# Altium PCB pwir21-NUCLEO-adapter.PcbDoc
Units mm, origin at the board's own origin, x right, y up, seen from the top; angles counter-clockwise.
Board outline 36 x 50 mm, 4 copper layers (Top Layer, L2, L3, Bottom Layer), stack 1.588 mm thick; 25 components, 30 nets, 123 pads, 174 vias.
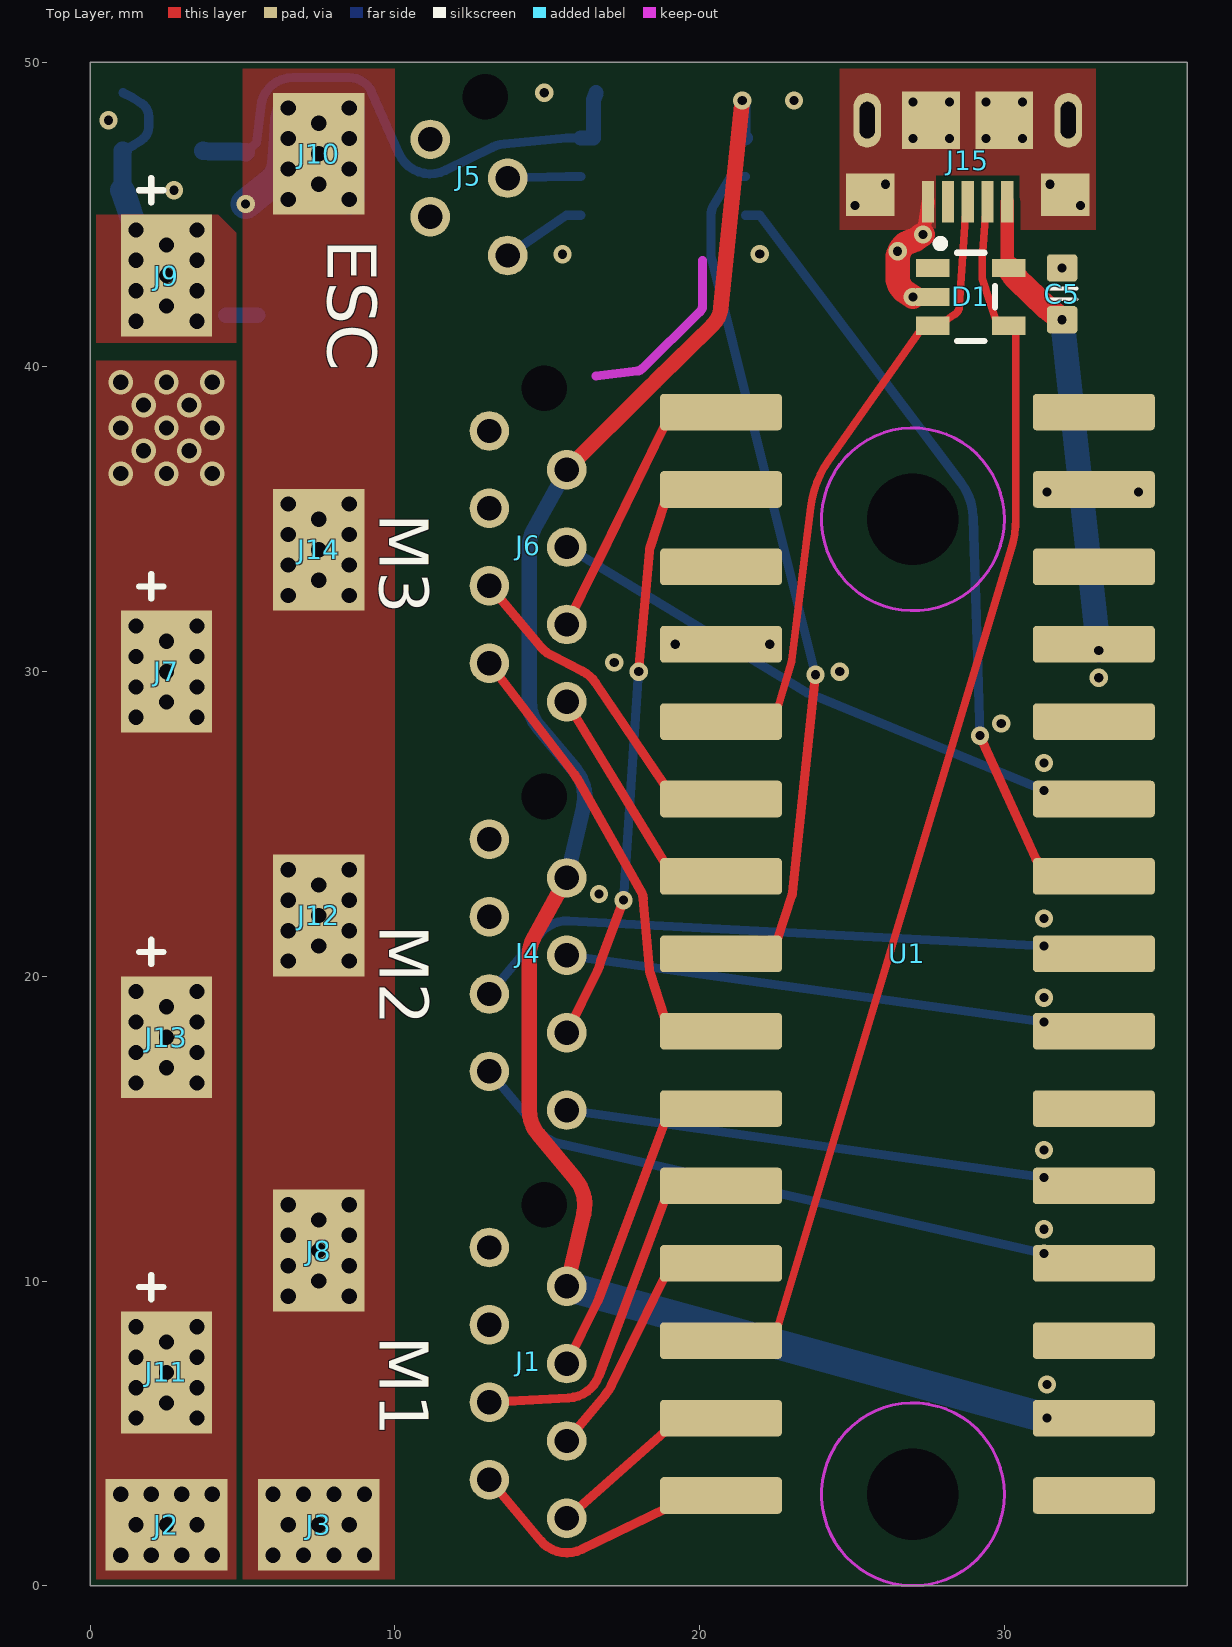
[diagram p0: Top Layer view]
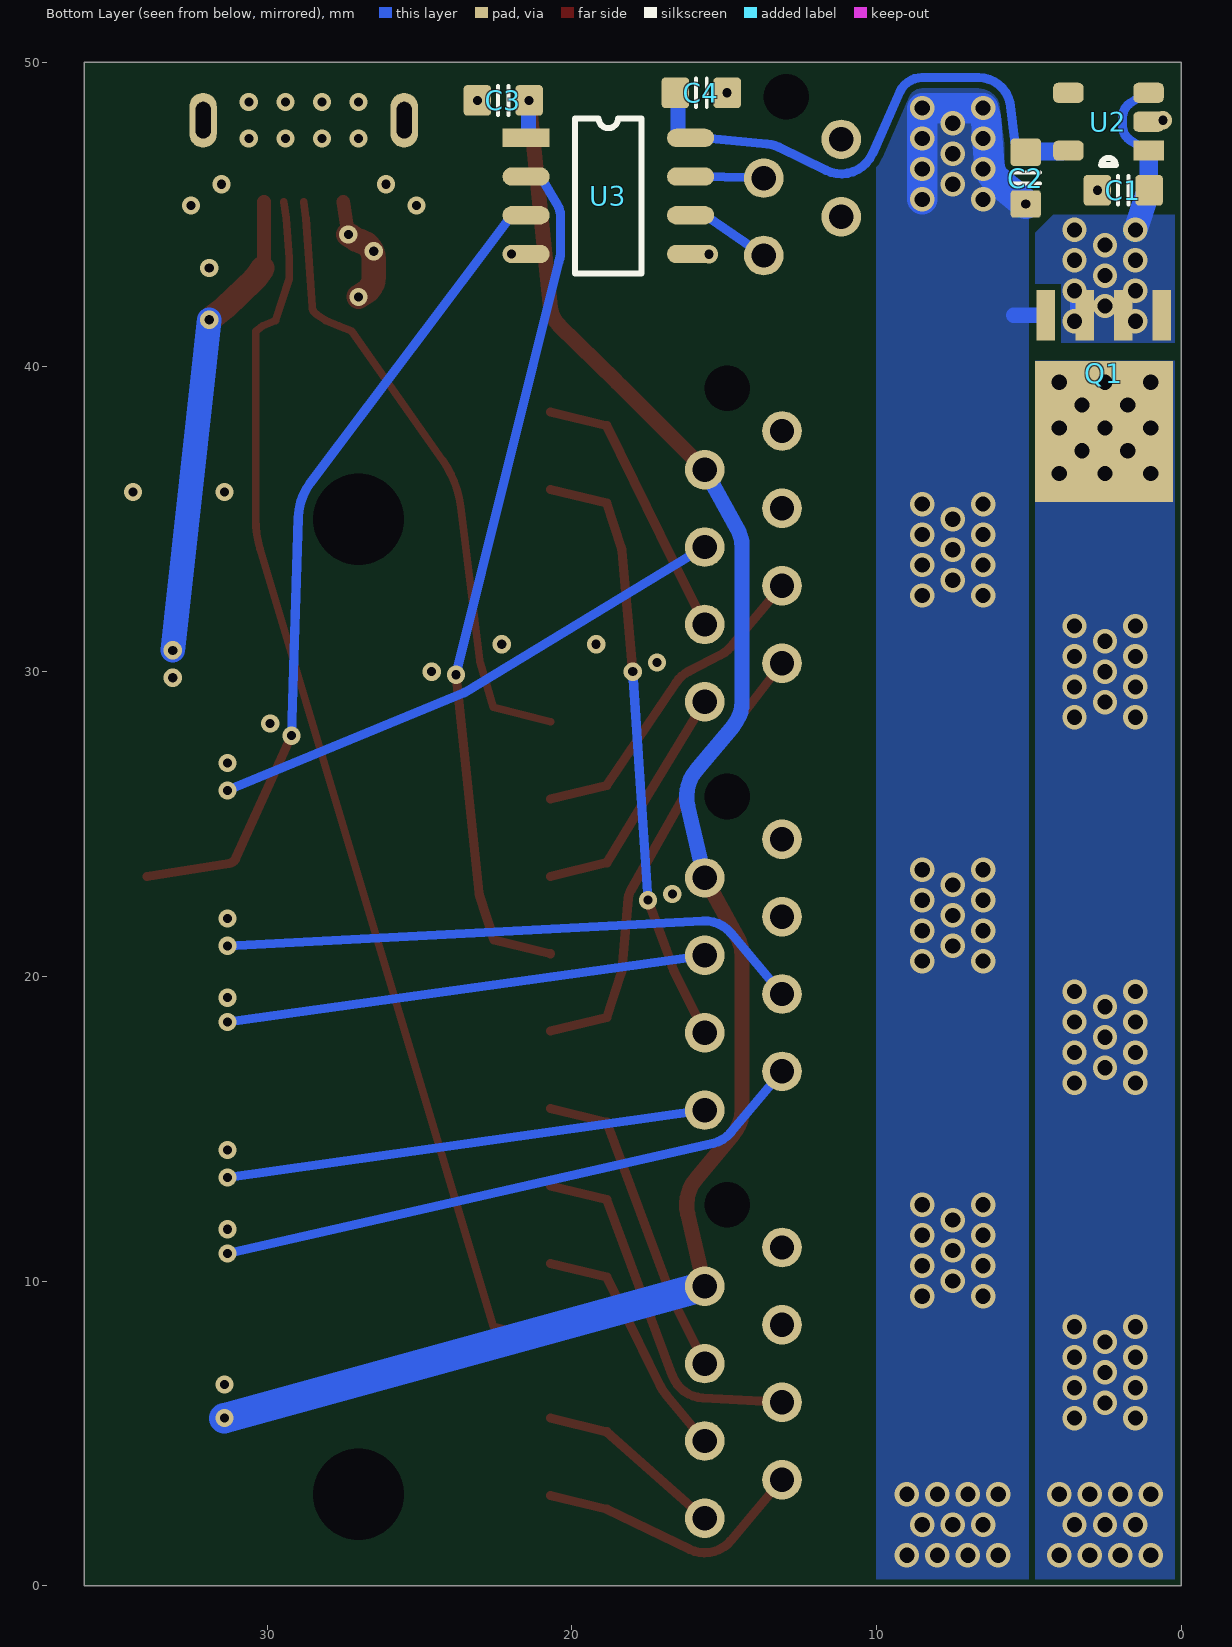
[diagram p1: Bottom Layer view, seen from below]
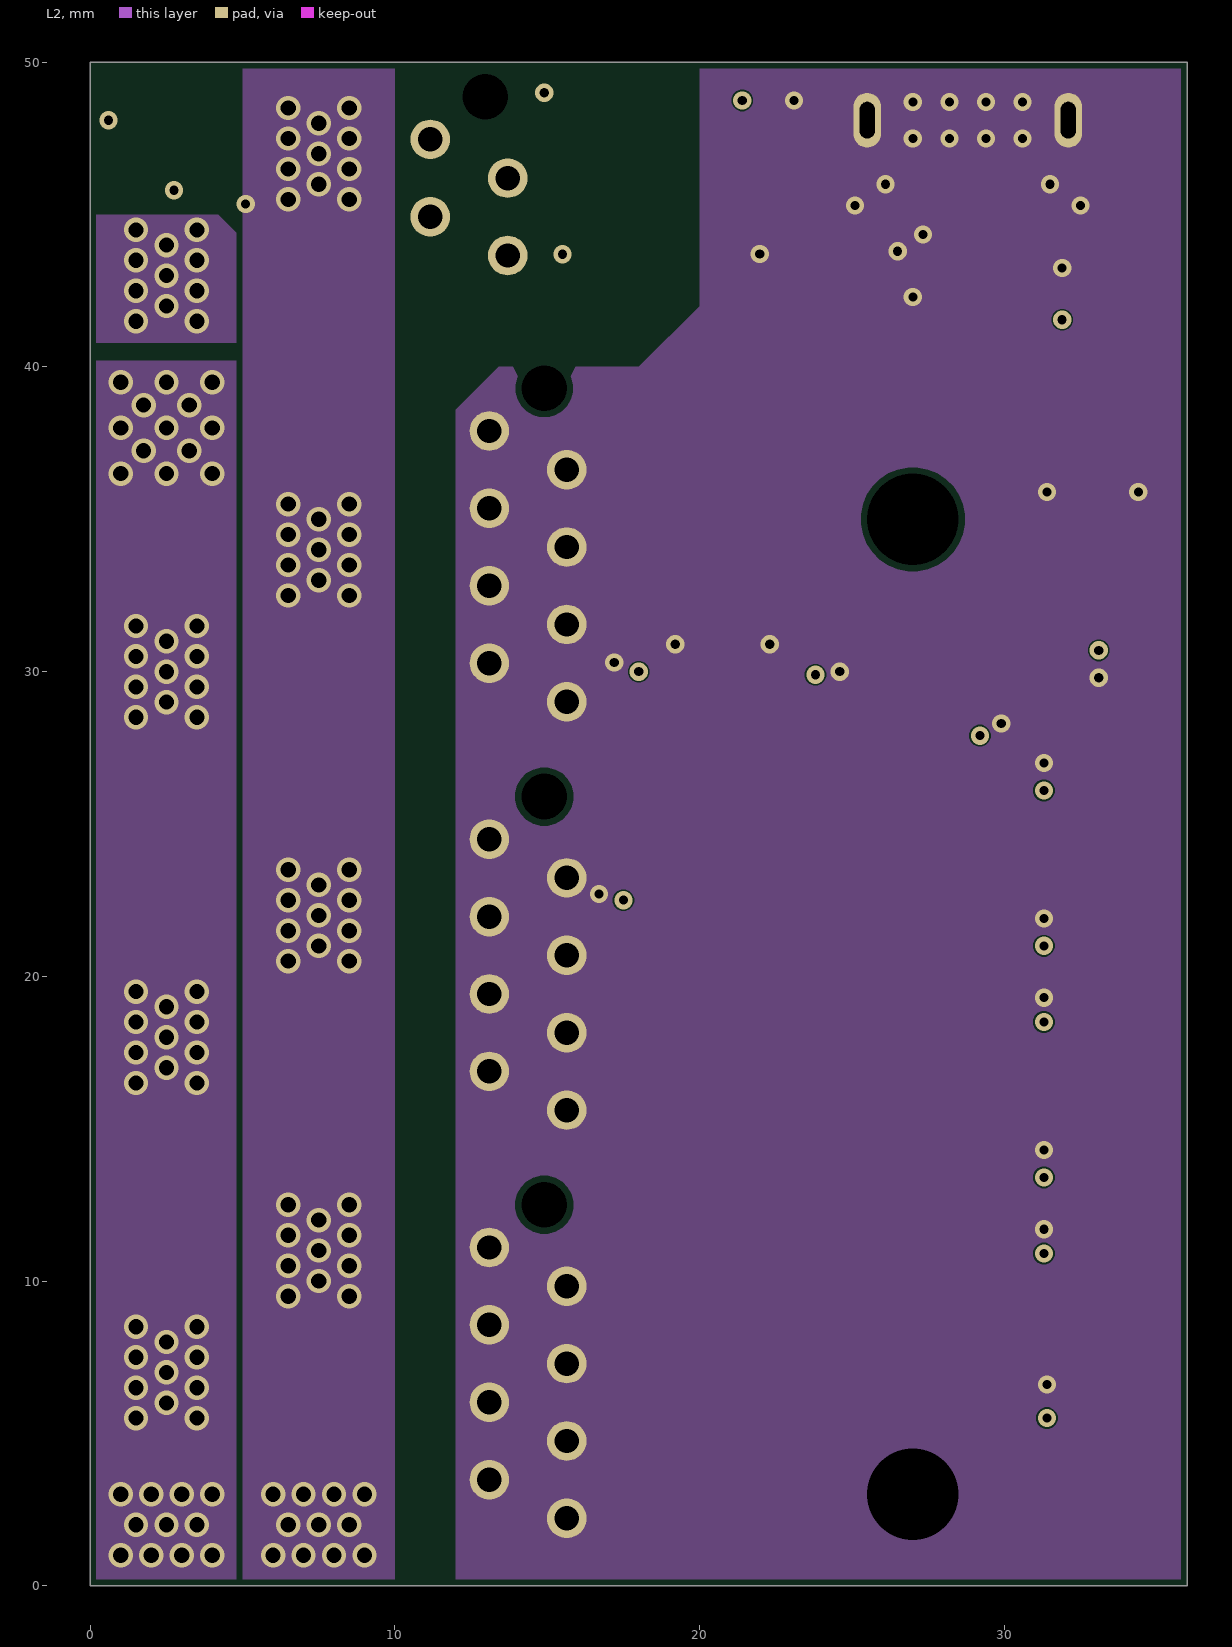
[diagram p2: L2]
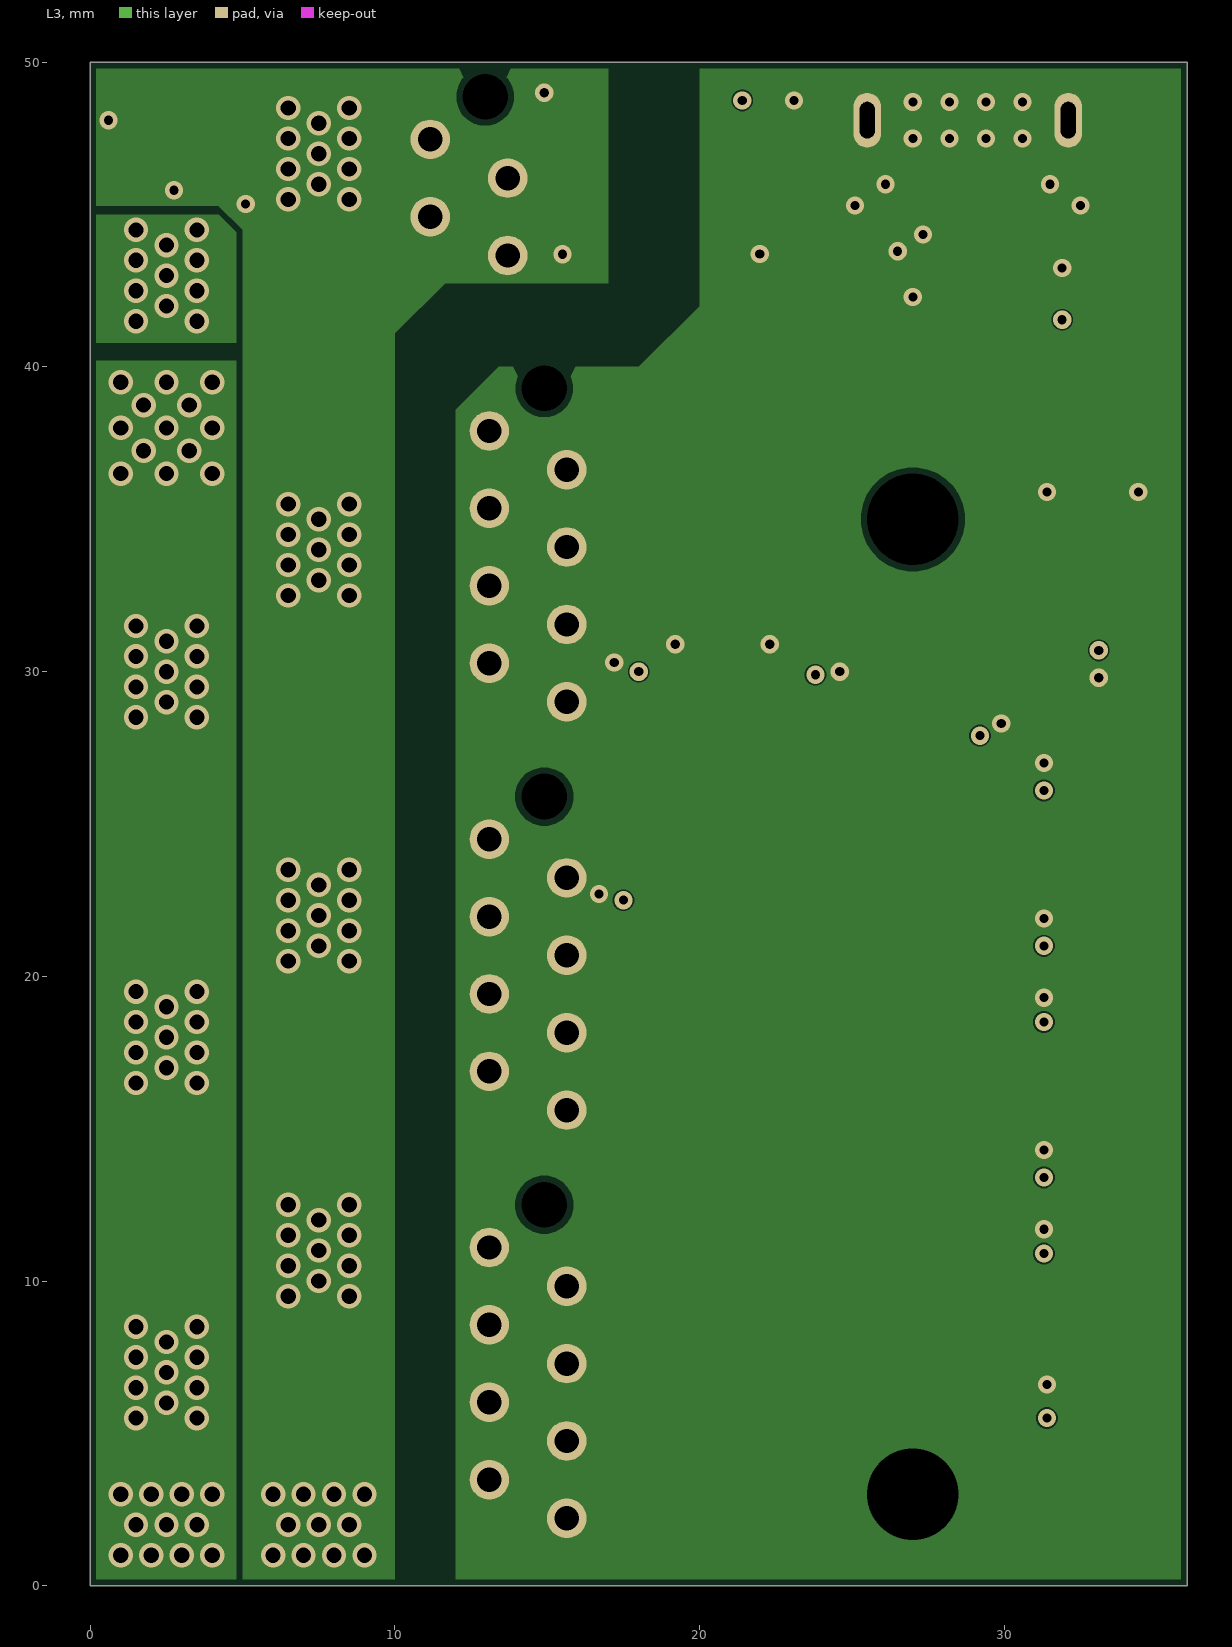
[diagram p3: L3]
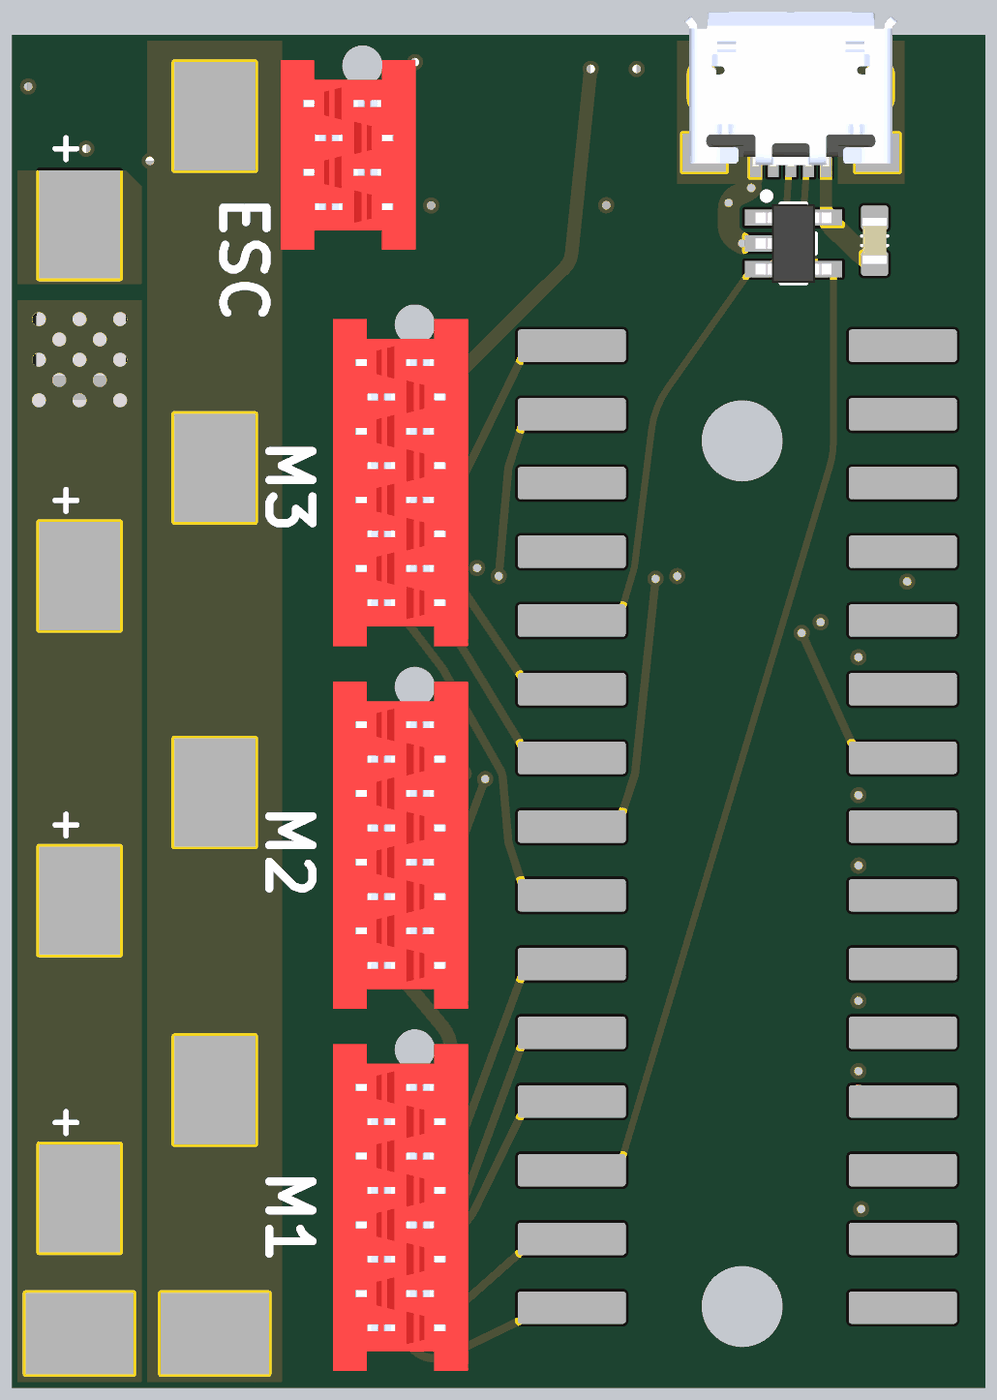
[diagram p4: 3D render of the assembled board from above, using the file's embedded part models]
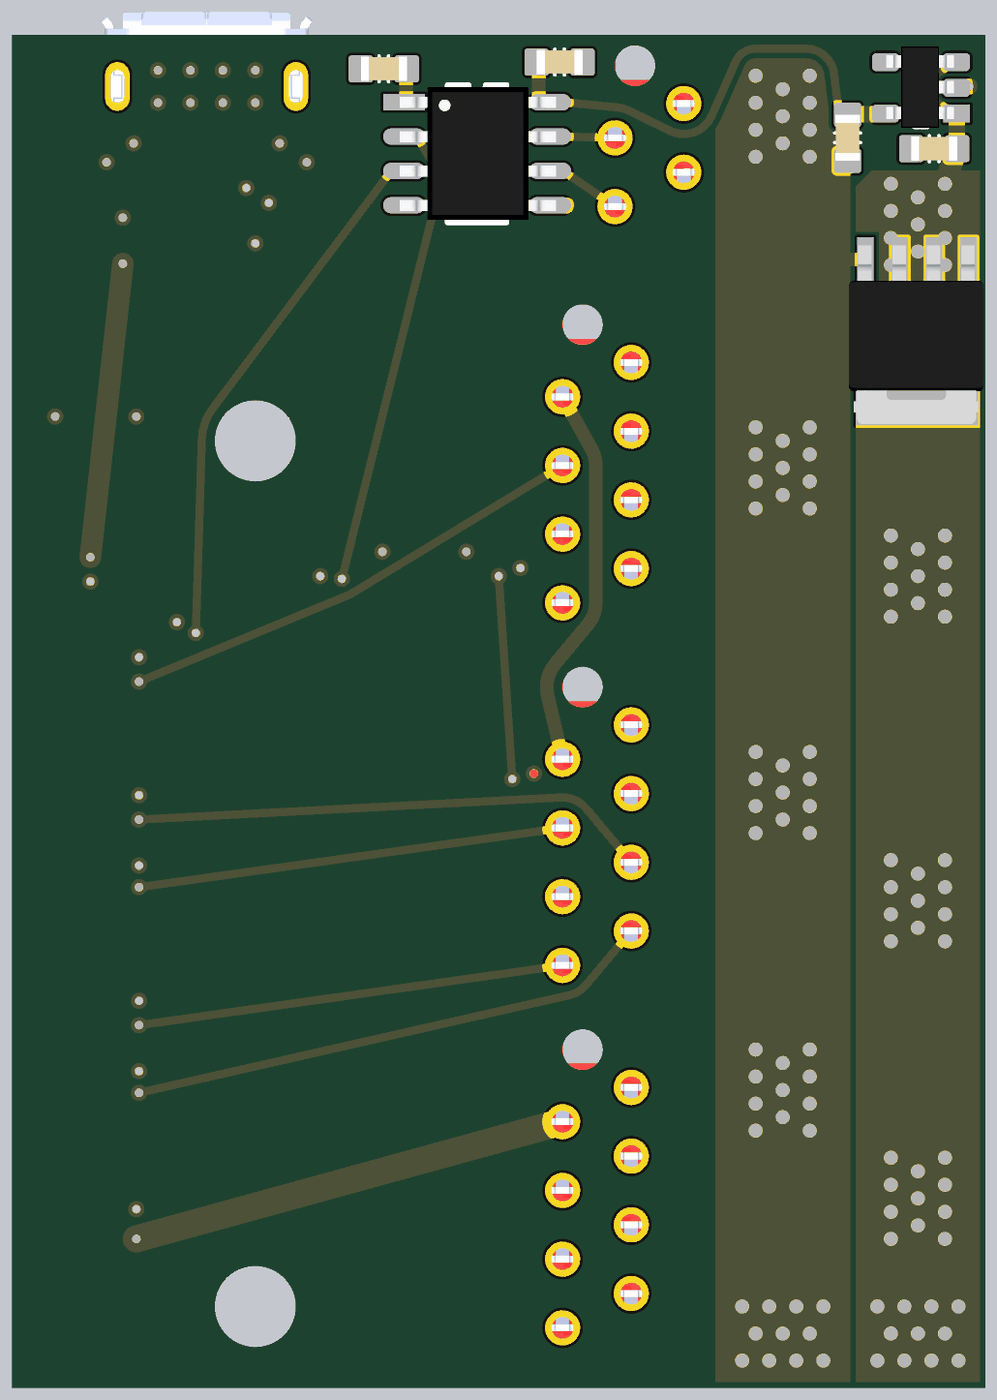
[diagram p5: 3D render of the assembled board from below, using the file's embedded part models]

## Layer stack, top to bottom
Top Solder: solder mask 0.0102, Solder Resist, Dk 3.5
Top Layer: signal copper 0.035
Dielectric 2: prepreg 0.2083, PP-022, Dk 4.5
L2: signal copper 0.018
Dielectric 1: core 1.065, Core-042, Dk 4.6
L3: signal copper 0.018
Dielectric 3: prepreg 0.2083, PP-022, Dk 4.5
Bottom Layer: signal copper 0.035
Bottom Solder: solder mask 0.0102, Solder Resist, Dk 3.5

## Board outline
0,0 36,0 36,50 0,50

## Design rules (kind name [scope] priority, off if disabled: settings)
BoardOutlineClearance [All] p1: gap=0.2 ignorepadtopadclearanceinfootprint=FALSE except(0: Arc-SplitContinuation Track-SplitContinuation SMDPad-SplitContinuation THPad-SplitContinuation Via-SplitContinuation Fill-SplitContinuation Poly-SplitContinuation Region-SplitContinuation Text-SplitContinuation)
Clearance [All] p1: gap=0.2 ignorepadtopadclearanceinfootprint=FALSE except(0: Arc-Hole Track-Hole SMDPad-Hole THPad-Hole Via-Hole Fill-Hole Poly-Hole Region-Hole Text-Hole; 0.127: SMDPad-SMDPad; 0.15: Track-Track; 0.33: Track-THPad)
ComponentClearance [not IsNetTieComponent vs not IsNetTieComponent] p1: gap=0.19 collisioncheckmode=3 verticalgap=0 showdistances=FALSE
DiffPairsRouting [All] p1: maxlimit=0.2 minlimit=0.2 mostfreqgap=0.2 toplayer_minwidth=0.2 toplayer_maxwidth=0.4 toplayer_prefwidth=0.3 midlayer1_minwidth=0.2 midlayer1_maxwidth=0.4 midlayer1_prefwidth=0.3 midlayer2_minwidth=0.2 midlayer2_maxwidth=0.4 midlayer2_prefwidth=0.3 bottomlayer_minwidth=0.2 bottomlayer_maxwidth=0.4 bottomlayer_prefwidth=0.3 maxuncoupledlength=10
HoleSize [All] p1: absolutevalues=TRUE maxlimit=5 minlimit=0.2 maxpercent=80.000 minpercent=20.000
HoleToHoleClearance [All] p1: gap=0.5 allowstackedmicrovias=FALSE
MinimumSolderMaskSliver [All] p1: minsoldermaskwidth=0.2
PlaneClearance [All] p1: clearance=0.2
PlaneConnect [All] p1: planeconnectstyle=Direct reliefexpansion=0.5 reliefentries=4 reliefconductorwidth=0.3 reliefairgap=0.2
PolygonConnect [All] p1: connectstyle=Direct reliefconductorwidth=0.3 reliefentries=4 polygonreliefangle="90 Angle" airgapwidth=0.2
RoomDefinition pwir21-NUCLEO-adapter [InComponentClass('pwir21-NUCLEO-adapter')] p1: confinementstyle=ConfineIn formatcopy=TRUE lockcomponents=FALSE outline -50,-50 214,-50 214,121 -50,121
RoutingVias [All] p1: holewidth=0.2 width=0.45 viastyle="Through Hole" minholewidth=0.2 minwidth=0.45 maxholewidth=3 maxwidth=5
SilkToSilkClearance [All] p1: silktosilkclearance=0.2
SilkToSolderMaskClearance [IsPad] p1: minsilkscreentomaskgap=0.2 clearancetoexposedcopper=TRUE
SolderMaskExpansion SolderMaskExpansionVia [IsVia] p1: expansion=0 istentingtop=TRUE useseparateexpansions=TRUE expansionbottom=0 istentingbottom=TRUE
SolderMaskExpansion [All] p2: expansion=0.1 istentingtop=FALSE
Width [All] p1: maxlimit=5 minlimit=0.2 preferedwidth=0.3
21 further rules are at their usual default settings.

## Components (designator, comment, footprint, x,y, rotation, side; value= is the part's Value field where it differs from the comment)
C1 "approved sub OK" CAPC1608X90N 1.9,45.8 r0 bottom value=1u
C2 "approved sub OK" CAPC1608X90N 5.1,46.2 r270 bottom value=1u
C3 "approved sub OK" CAPC1608X90N 22.25,48.75 r180 bottom value=100n
C4 "approved sub OK" CAPC1608X90N 15.75,49 r180 bottom value=100n
C5 "100p" CAPC1608X90N 31.9,42.4 r270 top
D1 "WE 824011" WE-TVS_SOT23-5L 28.9,42.3 r270 top
J1 "MOTOR1" MICRO-MATCH-FOB-08 13.1,11.1 r90 top
J2 "BAT+" POWER-PAD-4x3 2.5,2 r0 top
J3 "BAT-" POWER-PAD-4x3 7.5,2 r0 top
J4 "MOTOR2" MICRO-MATCH-FOB-08 13.1,24.5 r90 top
J5 "ESC" MICRO-MATCH-FOB-04 11.16,47.47 r90 top
J6 "MOTOR3" MICRO-MATCH-FOB-08 13.1,37.9 r90 top
J7 "OUT+" POWER-PAD-4x3 2.5,30 r90 top
J8 "OUT-" POWER-PAD-4x3 7.5,11 r270 top
J9 "+16" POWER-PAD-4x3 2.5,43 r90 top
J10 "PGND" POWER-PAD-4x3 7.5,47 r270 top
J11 "OUT+" POWER-PAD-4x3 2.5,7 r90 top
J12 "OUT-" POWER-PAD-4x3 7.5,22 r90 top
J13 "OUT+" POWER-PAD-4x3 2.5,18 r90 top
J14 "OUT-" POWER-PAD-4x3 7.5,34 r90 top
J15 "10118193-0001LF" FCI_10118193-0001LF 28.8,48.1 r180 top
Q1 "BUK6Y10-30P" SOT669 2.535,39.05 r270 bottom
U1 "NUCLEO-G431KB" NUCLEO-32-SMT 26.82,20.74 r0 top
U2 "MIC5225" SOT23-5 1.07,47.1 r0 bottom
U3 "SI8620" SOIC8 21.5,47.52 r180 bottom

## Footprints (in the part's own frame and the unit in brackets; to place one, negate y for a bottom-side part, rotate by r counter-clockwise, add the part's x,y. Pads: shape width x height; smd on the part's side, far side on the other; paste and mask are expansions set on the pad)
CAPC1608X90N [mm] "Chip Capacitor, Body 1.6x0.8mm, EIA 0603, IPC Medium Density"
  round 0.254 on Mech15: 0(0,0)
  rrect25% 0.9x1 smd: 1(-0.85,0) 2(0.85,0)
  Top Layer pour cut-out: -0.6,0.5 -0.4,0.7 0.4,0.7 0.6,0.5 0.6,-0.5 0.4,-0.7 -0.4,-0.7 -0.6,-0.5
  silkscreen extent -0.18,-0.48 0.18,0.48, body extent -0.85,-0.45 0.85,0.45, height 0.89
FCI_10118193-0001LF [mm]
  rect 0.4x1.35 smd: 1(-1.3,2.675) 2(-0.65,2.675) 3(0,2.675) 4(0.65,2.675) 5(1.3,2.675)
  rect 1.6x1.4 smd: S1(-3.2,2.45) S2(3.2,2.45)
  rect 1.9x1.9 smd: S3(1.2,0) S4(-1.2,0)
  oval 0.9x1.8 hole 0.5 slot 1.2 at 90 deg: S5(-3.3,0) S6(3.3,0)
  body extent -3.93,-2.76 3.93,2.95, height 2.86
MICRO-MATCH-FOB-04 [mm]
  round 1.3 hole 0.8: 1(0,0) 2(-1.27,-2.54) 3(-2.54,0) 4(-3.81,-2.54)
  round 0 hole 1.5 unplated: drill(1.4,-1.8)
  body extent -5.41,-3.77 1.6,1.23, height 4
MICRO-MATCH-FOB-08 [mm]
  round 1.3 hole 0.8: 1(0,0) 2(-1.27,-2.54) 3(-2.54,0) 4(-3.81,-2.54) 5(-5.08,0) 6(-6.35,-2.54) 7(-7.62,0) 8(-8.89,-2.54)
  round 0 hole 1.5 unplated: drill(1.4,-1.8)
  body extent -10.49,-3.77 1.6,1.23, height 4
NUCLEO-32-SMT [mm]
  rrect20% 4x1.2 smd: 1(-6.12,17.78) 2(-6.12,15.24) 3(-6.12,12.7) 4(-6.12,10.16) 5(-6.12,7.62) 6(-6.12,5.08) 7(-6.12,2.54) 8(-6.12,0) 9(-6.12,-2.54) 10(-6.12,-5.08) 11(-6.12,-7.62) 12(-6.12,-10.16) 13(-6.12,-12.7) 14(-6.12,-15.24) 15(-6.12,-17.78) 16(6.12,-17.78) 17(6.12,-15.24) 18(6.12,-12.7) 19(6.12,-10.16) 20(6.12,-7.62) 21(6.12,-5.08) 22(6.12,-2.54) 23(6.12,0) 24(6.12,2.54) 25(6.12,5.08) 26(6.12,7.62) 27(6.12,10.16) 28(6.12,12.7) 29(6.12,15.24) 30(6.12,17.78)
  body extent -8.87,-19.9 8.87,19.9, height 8.5
POWER-PAD-4x3 [mm]
  rect 4x3 smd: 1(0,0)
SOIC8 [mm]
  rect 1.55x0.6 smd: 1(0,0)
  oval 1.55x0.6 smd: 2(0,-1.27) 3(0,-2.54) 4(0,-3.81) 5(5.4,-3.81) 6(5.4,-2.54) 7(5.4,-1.27) 8(5.4,0)
  silkscreen extent 1.61,-4.45 3.79,0.63, body extent -0.16,-4.35 5.61,0.55, height 1.46
SOT23-5 [mm]
  rect 1x0.66 smd: 1(0,0)
  rrect50% 1x0.66 smd: 2(0,-0.95) 3(0,-1.9) 4(2.63,-1.9) 5(2.63,0)
  silkscreen extent 1.08,0.24 1.55,0.48, body extent 0.1,-2.47 2.6,0.53, height 1.11
SOT669 [mil]
  rect 182x178 smd: D(46,0)
  rect 65x24 smd: G(-104.33,-75) S(-104.33,-25) S(-104.33,25) S(-104.33,75)
  body extent -125,-99 135,97, height 43
WE-TVS_SOT23-5L [mm] "TVS Diode, package SOT23-5L"
  rect 0.6x1.1 smd: 1(-0.95,-1.25) 2(0,-1.25) 3(0.95,-1.25) 4(0.95,1.25) 5(-0.95,1.25)
  silkscreen extent -1.85,-1.1 1.45,0.8, body extent -1.45,-1.4 1.45,1.4, height 1.16

## Part data
C1 C2: library part CAPC_1u_0603_X7R_16V_10%, "Capacitor SMD Cer 1uF 10% 16V X7R 0603", Manufacturer 1="TDK Corporation", Manufacturer Part Number 1=C1608X7R1C105K, Package / Case="0603 (1608 metric)", Ratings="16V; X7R", Supplier Part Number 1=445-1604-1-ND, Tolerance=±10%, ComponentLink1Description=http://product.tdk.com/capacitor/mlcc/en/documents/mlcc_commercial_general_en.pdf, ComponentLink1URL=http://product.tdk.com/capacitor/mlcc/en/documents/mlcc_commercial_general_en.pdf, Material=ceramic, SCDType=spec, Supplier 1=Digi-Key
C3 C4: library part CAPC_100n_0603_X7R_50V_10%, "Capacitor SMD Cer 100nF 10% 50V X7R 0603", Manufacturer 1="AVX Corporation", Manufacturer 2="TDK Corporation", Manufacturer Part Number 1=06035C104KAT2A, Manufacturer Part Number 2=C1608X7R1H104K, Package / Case="0603 (1608 Metric)", Ratings="50V; X7R", Supplier Part Number 1=478-5052-1-ND, Tolerance=±10%, ComponentLink1Description=http://www.avx.com/docs/Catalogs/cx7r.pdf, ComponentLink1URL=http://www.avx.com/docs/Catalogs/cx7r.pdf, ComponentLink2Description=http://product.tdk.com/capacitor/mlcc/en/documents/mlcc_commercial_general_en.pdf, ComponentLink2URL=http://product.tdk.com/capacitor/mlcc/en/documents/mlcc_commercial_general_en.pdf, Material=ceramic, SCDType=spec, Supplier 1=Digi-Key, Supplier 2=Digi-Key, Supplier Part Number 2=445-1314-1-ND
C5: library part CAPC_100p_0603_NP0_50V_1%, "Capacitor SMD Cer 100pF 1% 50V NP0 0603", Manufacturer 1="AVX Corporation", Manufacturer 2="Samsung Electro-Mechanics America, Inc", Manufacturer 3=Kemet, Manufacturer Part Number 1=06035A101FAT2A, Manufacturer Part Number 2=CL10C101FB8NNNC, Manufacturer Part Number 3=C0603C101F5GACTU, Operating Temperature="-55°C ~ 125°C", Package / Case="0603 (1608 Metric)", Ratings="50V; NP0", Supplier Part Number 1=478-6202-1-ND, Tolerance=±1%, ComponentLink1Description=http://www.avx.com/docs/Catalogs/ccog.pdf, ComponentLink1URL=http://www.avx.com/docs/Catalogs/ccog.pdf, ComponentLink2Description=http://www.samsungsem.com/servlet/FileDownload?type=spec&file=CL10C101FB8NNNC.pdf, ComponentLink2URL=http://www.samsungsem.com/servlet/FileDownload?type=spec&file=CL10C101FB8NNNC.pdf, ComponentLink3Description=http://www.kemet.com/datasheets&C0603C101F5GACTU, ComponentLink3URL=http://www.kemet.com/datasheets&C0603C101F5GACTU, RoHS 1="RoHS Compliant", RoHS 2="RoHS Compliant", RoHS 3="RoHS Compliant", SCDType=source, Size / Dimension="0.063\" L x 0.032\" W (1.60mm x 0.81mm)", Supplier 1=Digi-Key, Supplier 2=Digi-Key, Supplier 3=Digi-Key, Supplier Part Number 2=1276-2159-1-ND, Supplier Part Number 3=399-7819-1-ND, Thickness (Max)="0.035\" (0.90mm)"
D1: library part 824011, "WE-TVS TVS Diode - High Speed Series, SOT23-5L, 2+1Channel, 5Vdc", Channel Input Capacitance=2pF, DC Operating Voltage=5V, Manufacturer="Wurth Elektronik", Operating Temperature="-55 to +125degC", Reverse Breakdown Voltage min.=6.1V, Reverse Channel Leakage Current=5uA, Reverse Peak Pulse Current=12A, Channel=2+1, ComponentLink1Description=Manufacturer, ComponentLink1URL=http://www.we-online.de, ComponentLink2Description=Datasheet, ComponentLink2URL=https://www.we-online.com/catalog/datasheet/824011.pdf, Manufacturer Part Number=824011, Mounting Technology=SMT, Packaging="Tape and Reel", Published Date="April 2020", Size=SOT23-5L
J1 J4 J6: library part HEADER-8
J2 J3 J7 J8 J9 J10 J11 J12 J13 J14: library part HEADER-1
J5: library part HEADER-4
J15: "USB - micro B USB 2.0 Receptacle Connector 5 Position Surface Mount, Right Angle; Through Hole", Package=None, Availability=Unavailable, MF="Amphenol ICC", MP=10118193-0001LF, Price=None, SnapEDA_Link=https://www.snapeda.com/parts/10118193-0001LF/Amphenol%20FCI/view-part/2758989/?ref=snap
Q1: library part MOSFET-P
U2: library part LDO-SOT23-5

## Free pads (board coordinates)
  round 0 hole 3 unplated: MH(27,3) MH(27,35)

## Via types
v1: diameter 0.8, hole 0.5, Top Layer to Bottom Layer, tented both sides, 123 vias
v2: diameter 0.6, hole 0.3, Top Layer to Bottom Layer, tented both sides, 51 vias

## Nets (pads, with @x,y where several pads share a name; then routed paths per layer and width w, separated by ;. In a path a pad name is that pad's centre, name@x,y a point inside that pad or via, vN(x,y) a via of type N, cw(c..) or ccw(c..) an arc to the next point about the centre after c; other vN are vias at no path point)
+3.3: C3.2 J1.2 J4.2 J6.2 U1.17 U3.1 | length 60.6
  Top Layer w0.5: J1.2 16.195,12.196 ccw(c14.9,12.5) 15.921,13.352 14.695,14.822 cw(c15.64,15.61) 14.41,15.613 14.41,18.15 cw(c15.64,18.15) 14.41,18.159 14.41,20.69 cw(c15.64,20.69) 14.564,21.286 J4.2 ; J6.2 18.417,39.403 cw(c18.82,39) 18.424,39.41 18.531,39.513 ccw(c17.907,40.161) 18.538,39.52 20.432,41.385 ccw(c19.8,42.026) 20.695,41.934 v2(21.4,48.75) v2@21.409,48.739
  Bottom Layer w0.5: J4.2 16.195,25.596 ccw(c14.9,25.9) 15.921,26.752 14.695,28.222 cw(c15.64,29.01) 14.41,29.01 14.41,34.09 cw(c15.64,34.09) 14.564,34.686 J6.2 ; v2(21.4,48.75) 21.42,48.5 21.42,47.57 U3.1
  Bottom Layer w1: J1.2 v2(31.4,5.5)
+5: C5.2 D1.5 J15.1 U1.27 | length 15.6
  Top Layer w0.45: J15.1 30.1,44.873 30.1,43.325 D1.5
  Top Layer w0.8: D1.5 30.304,43.017 ccw(c30.973,43.456) 30.42,42.878 31.381,41.954 v2(31.9,41.55)
  Bottom Layer w0.8: v2(31.9,41.55) v2(33.1,30.7)
+5V_M: C2.1 C4.1 U2.5 U3.8 | length 18
  Bottom Layer w0.3: C2.1 5.45,47.35 5.623,48.689 cw(c6.646,48.449) 6.647,49.5 8.5,49.5 cw(c8.5,48.69) 9.227,49.047 ; 9.228,49.045 9.227,49.047 ; U3.8 15.625,47.52 13.592,47.325 ccw(c13.7,46.2) 13.201,47.214 11.658,46.456 cw(c11.16,47.47) 10.127,47.013 9.227,49.047
  Bottom Layer w0.5: U3.8 16.516,47.52 16.516,48.75 C4.1
  Bottom Layer w0.6: U2.5 3.9,47.07 4.9,47.07 C2.1
+16: C1.1 J9.1 Q1.S U2.1 U2.3 | length 7.4
  Bottom Layer w0.3: U2.1 1.42,47.28 1.686,47.454 ccw(c1.405,47.885) 1.92,47.885 1.92,48.215 ccw(c1.405,48.215) 1.692,48.643 1.405,48.835 U2.3 ; Q1.S@1.9,41.7 2.055,41.783 2.086,41.783 2.155,41.849 2.177,41.849 2.255,42 v1(2.5,42) ; Q1.S@3.17,41.7 3.325,41.5 v1(3.5,41.5) ; v1@3.5,41.7 v1(3.5,42.5)
  Bottom Layer w0.6: C1.1 1.06,46 1.06,47.07 U2.1
  Bottom Layer w0.8: C1.1 1.1,45.7 v1(1.5,44.5)
  other v1: 1.5,41.5 1.5,42.5 2.5,43 1.5,43.5 3.5,43.5 2.5,44 3.5,44.5
BAT+: J2.1 J7.1 J11.1 J13.1 Q1.D
  other v1: 1,1 2,1 3,1 4,1 1.5,2 2.5,2 3.5,2 1,3 2,3 3,3 4,3 1.5,5.5 3.5,5.5 2.5,6 1.5,6.5 3.5,6.5 2.5,7 1.5,7.5 3.5,7.5 2.5,8 1.5,8.5 3.5,8.5 1.5,16.5 3.5,16.5 2.5,17 1.5,17.5 3.5,17.5 2.5,18 1.5,18.5 3.5,18.5 2.5,19 1.5,19.5 3.5,19.5 1.5,28.5 3.5,28.5 2.5,29 1.5,29.5 3.5,29.5 2.5,30 1.5,30.5 3.5,30.5 2.5,31 1.5,31.5 3.5,31.5 1,36.5 2.5,36.5 4,36.5 1.75,37.25 3.25,37.25 1,38 2.5,38 4,38 1.75,38.75 3.25,38.75 1,39.5 2.5,39.5 4,39.5
GND: C3.1 C5.1 D1.2 J1.1 J4.1 J6.1 J15.5 J15.S1 J15.S2 J15.S3 J15.S4 J15.S5 J15.S6 pad.MH@27,3 U1.4 U1.29 U3.4 | length 3.8
  Top Layer w0.45: v2(27.334,44.349) J15.5
  Top Layer w0.8: v2(27,42.3) 26.773,42.447 cw(c27.1,42.95) 26.5,42.95 26.5,43.55 cw(c27.1,43.55) 26.923,44.123 ccw(c26.687,44.888) 26.953,44.133 26.981,44.143 ccw(c26.714,44.897) 27.159,44.232 27.264,44.302 ccw(c26.823,44.97) 27.268,44.305 v2(27.334,44.349)
  other v2: 31.4,6.6 31.3,11.7 31.3,14.3 31.3,19.3 31.3,21.9 16.7,22.7 31.3,27 29.9,28.3 33.1,29.8 24.6,30 17.2,30.3 19.2,30.9 22.3,30.9 31.4,35.9 34.4,35.9 31.9,43.25 21.975,43.71 26.5,43.8 25.1,45.3 32.5,45.3 26.1,46 31.5,46 27,47.5 28.2,47.5 29.4,47.5 30.6,47.5 27,48.7 28.2,48.7 29.4,48.7 30.6,48.7 23.1,48.75
M1_DIR1: J1.4 U1.10 | length 10.5
  Top Layer w0.3: J1.4 16.652,9.327 ccw(c15.64,9.83) 16.699,9.436 18.85,15.21 U1.10
M1_DIR2: J1.5 U1.11 | length 12
  Top Layer w0.3: J1.5 15.701,6.162 ccw(c15.64,7.29) 16.699,6.896 18.85,12.67 U1.11
M1_ENCA: J1.7 U1.15 | length 9
  Top Layer w0.3: J1.7 14.774,1.484 ccw(c15.64,2.21) 16.133,1.193 18.85,2.51 U1.15
M1_ENCB: J1.8 U1.14 | length 6.2
  Top Layer w0.3: J1.8 18.85,5.05 U1.14
M1_PWM: J1.6 U1.12 | length 8.2
  Top Layer w0.3: J1.6 16.89,6.244 ccw(c15.64,7.29) 17.103,6.572 18.85,10.13 U1.12
M2_DIR1: J4.4 U1.22 | length 15.8
  Bottom Layer w0.3: J4.4 v2(31.3,18.5)
M2_DIR2: J4.5 U1.23 | length 19.3
  Bottom Layer w0.3: J4.5 14.774,21.416 cw(c15.64,20.69) 15.699,21.818 v2(31.3,21)
M2_ENCA: J4.7 U1.19 | length 19.7
  Bottom Layer w0.3: J4.7 14.774,14.884 ccw(c15.64,15.61) 15.364,14.514 ccw(c15.64,15.61) 15.39,14.508 v2(31.3,10.9)
M2_ENCB: J4.8 U1.20 | length 15.8
  Bottom Layer w0.3: J4.8 v2(31.3,13.4)
M2_PWM: J4.6 U1.2 | length 19.8
  Top Layer w0.3: J4.6 16.652,20.187 ccw(c15.64,20.69) 16.749,20.474 cw(c17.044,20.417) 16.763,20.523 v2(17.5,22.5) ; v2(18,30) 18.351,33.95 ccw(c18.052,33.978) 18.351,33.956 cw(c18.82,33.92) 18.373,34.066 18.85,35.53 U1.2
  Bottom Layer w0.3: v2(17.5,22.5) v2(18,30)
M3_DIR1: J6.4 U1.25 | length 17.6
  Bottom Layer w0.3: J6.4 23.463,29.344 ccw(c23.8,29.9) 23.521,29.313 23.523,29.312 ccw(c23.65,29.584) 23.537,29.306 v2(31.3,26.1)
M3_DIR2: J6.5 U1.6 | length 10.8
  Top Layer w0.3: J6.5 14.774,30.824 ccw(c15.64,31.55) 15.124,30.545 16.156,30.015 cw(c15.64,29.01) 16.577,29.642 18.85,26.27 U1.6
M3_ENCA: J6.7 U1.9 | length 15.2
  Top Layer w0.3: J6.7 15.877,26.647 cw(c14.9,25.9) 15.969,26.508 18.065,22.821 cw(c17.5,22.5) 18.148,22.557 18.352,20.219 ccw(c18.82,20.26) 18.373,20.115 18.85,18.65 U1.9
M3_ENCB: J6.8 U1.7 | length 8.1
  Top Layer w0.3: J6.8 18.85,23.73 U1.7
M3_PWM: J6.6 U1.1 | length 9.2
  Top Layer w0.3: J6.6 16.652,33.587 ccw(c15.64,34.09) 16.655,33.593 18.85,38.07 U1.1
PGND: C1.2 C2.2 C4.2 J3.1 J5.1 J5.3 J8.1 J10.1 J12.1 J14.1 Q1.G U2.2 U3.5 | length 9.7
  Bottom Layer w0.5: Q1.G 5.5,41.7
  Bottom Layer w1: v2(5.1,45.35) 6,46.082 ccw(c5.488,46.712) 6.298,46.653 6.361,47.51 6.403,48.081 cw(c7.5,48) 6.444,48.308 v1(6.5,48.5) v1(8.5,48.5) v1(8.5,47.5) v1(8.5,46.5) v1(8.5,45.5)
  other v1: 6,1 7,1 8,1 9,1 6.5,2 7.5,2 8.5,2 6,3 7,3 8,3 9,3 6.5,9.5 8.5,9.5 7.5,10 6.5,10.5 8.5,10.5 7.5,11 6.5,11.5 8.5,11.5 7.5,12 6.5,12.5 8.5,12.5 6.5,20.5 8.5,20.5 7.5,21 6.5,21.5 8.5,21.5 7.5,22 6.5,22.5 8.5,22.5 7.5,23 6.5,23.5 8.5,23.5 6.5,32.5 8.5,32.5 7.5,33 6.5,33.5 8.5,33.5 7.5,34 6.5,34.5 8.5,34.5 7.5,35 6.5,35.5 8.5,35.5 6.5,45.5 7.5,46 6.5,46.5 7.5,47 6.5,47.5 7.5,48
  other v2: 15.5,43.7 2.75,45.8 0.6,48.1 14.9,49
PWM5: U1.24 U3.3 | length 27.3
  Top Layer w0.3: v2(29.2,27.9) 31.024,23.877 ccw(c31.298,24.001) 31.25,23.705 U1.24@33.94,23.28
  Bottom Layer w0.3: U3.3 21.975,44.98 28.583,36.19 cw(c27,35) 28.979,35.061 v2(29.2,27.9)
PWM5_OUT: J5.4 U3.6 | length 2.8
  Bottom Layer w0.3: J5.4 15.625,44.98 U3.6
PWM_ESC: U1.8 U3.2 | length 28.1
  Top Layer w0.3: U1.8 22.55,21.19 23.027,22.654 ccw(c22.58,22.8) 23.038,22.696 ccw(c22.58,22.8) 23.047,22.751 23.705,29 23.799,29.893 cw(c24.097,29.86) v2(23.8,29.9)
  Bottom Layer w0.3: 20.467,45.313 ccw(c21.025,44.98) 20.375,44.98 20.375,43.714 ccw(c21.025,43.71) 20.417,43.481 cw(c20.136,43.375) 20.427,43.447 23.797,29.912 ccw(c24.088,29.985) v2(23.8,29.9) ; 20.467,45.313 21.025,46.25 U3.2
PWM_ESC_OUT: J5.2 U3.7 | length 2.4
  Bottom Layer w0.3: J5.2 15.625,46.25 U3.7
RX2: U1.21
TX2: U1.26
USB_D_N: D1.4 J15.2 U1.13 | length 40.5
  Top Layer w0.25: U1.13 22.575,8.515 30.233,34.03 ccw(c27,35) 30.375,35.004 30.375,41.175 D1.4 29.725,41.525 29.291,42.849 cw(c29.6,42.95) 29.275,42.95 29.275,43.55 cw(c29.6,43.55) 29.276,43.575 29.375,44.875 J15.2
USB_D_P: D1.3 J15.3 U1.5 | length 20.5
  Top Layer w0.25: U1.5 22.575,28.835 23.007,30.294 ccw(c22.58,30.42) 23.022,30.365 23.651,35.417 cw(c27,35) 24.241,36.944 27.225,41.175 D1.3 28.075,41.525 28.381,41.73 ccw(c28.2,42) 28.525,41.982 28.725,44.875 J15.3
pads on no net: C1.0 C2.0 C3.0 C4.0 C5.0 D1.1 J1.3 J1.drill J4.3 J4.drill J5.drill J6.3 J6.drill J15.4 U1.3 U1.16 U1.18 U1.28 U1.30 U2.4

## Polygon pours and split planes (outlines as drawn)
GND on Top Layer "GND_L01_P015" (solid, remove dead copper, pour order 15): 24.6,50 33,50 33,44.5 24.6,44.5
+16 on Top Layer "+16_L01_P009" (solid, remove dead copper, pour order 9): 0,40.8 0,45 4.2,45 5,44.2 5,40.8
PGND on Top Layer "PGND_L01_P000" (solid, remove dead copper, pour order 0): 5,0 10,0 10,50 5,50
BAT+ on Top Layer "BAT+_L01_P005" (solid, remove dead copper, pour order 5): 0,0 5,0 5,40.2 0,40.2
GND on L2 "GND_L02_P013" (solid, remove dead copper, pour order 13): 12,0 12,38.6 13.4,40 18,40 20,42 20,50 36,50 36,0
+16 on L2 "+16_L02_P010" (solid, remove dead copper, pour order 10): 0,40.8 0,45 4.2,45 5,44.2 5,40.8
BAT+ on L2 "BAT+_L02_P006" (solid, remove dead copper, pour order 6): 0,0 5,0 5,40.2 0,40.2
PGND on L2 "PGND_L02_P002" (solid, remove dead copper, pour order 2): 5,0 10,0 10,50 5,50
GND on L3 "GND_L03_P014" (solid, remove dead copper, pour order 14): 12,0 12,38.6 13.4,40 18,40 20,42 20,50 36,50 36,0
PGND on L3 "PGND_L03_P003" (solid, remove dead copper, pour order 3): 5,0 10,0 10,41.1 11.65,42.75 17,42.75 17,50 10,50 5,50 0,50 0,45.3 4.2,45.3 5,44.5
+16 on L3 "+16_L03_P011" (solid, remove dead copper, pour order 11): 0,40.8 0,45 5,45 5,40.8
BAT+ on L3 "BAT+_L03_P007" (solid, remove dead copper, pour order 7): 0,0 5,0 5,40.2 0,40.2
PGND on Bottom Layer "PGND_L04_P004" (solid, remove dead copper, pour order 4): 5,0 10,0 10,50 5,50
+16 on Bottom Layer "+16_L04_P012" (solid, remove dead copper, pour order 12): 0,40.8 0,45 4.2,45 5,44.2 5,40.8
BAT+ on Bottom Layer "BAT+_L04_P008" (solid, remove dead copper, pour order 8): 0,0 5,0 5,40.2 0,40.2

## Keep-outs
Top Layer:
  circle w0.1: c27,3 r3
  circle w0.1: c27,35 r3
  lines w0.3: 16.6,39.7 17.943,39.863 ccw(c17.907,40.161) 18.117,39.948 20.01,41.812 20.011,41.813 ccw(c19.8,42.026) 20.1,42.026 20.1,43.5

## Silkscreen, mask and mechanical layers (free items; w line width, h text height)
Top Overlay:
  lines w0.2: 1.6,9.8 2.4,9.8 ; 1.6,20.8 2.4,20.8 ; 1.6,32.8 2.4,32.8 ; 1.6,45.8 2.4,45.8 ; 2,9.4 2,10.2 ; 2,20.4 2,21.2 ; 2,32.4 2,33.2 ; 2,45.4 2,46.2
  text "ESC" at 7.8,44.2 h1.6 r270
  text "M3" at 9.5,35.2 h1.6 r270
  text "M2" at 9.5,21.7 h1.6 r270
  text "M1" at 9.5,8.2 h1.6 r270

## Text inside footprints (layer, text, board x,y; h text height)
J15: Top 3D Body "PCB END" at 24.05,49.4 h0.6 r180